# Altium PCB PCB.PcbDoc
Units mm, origin at the board's own origin, x right, y up, seen from the top; angles counter-clockwise.
Board outline 31.73 x 24.95 mm, 2 copper layers (Top Layer, Bottom Layer), stack 1.071 mm thick; 47 components, 28 nets, 156 pads, 5 vias.
Unrouted connection lines stored in the file: 86.
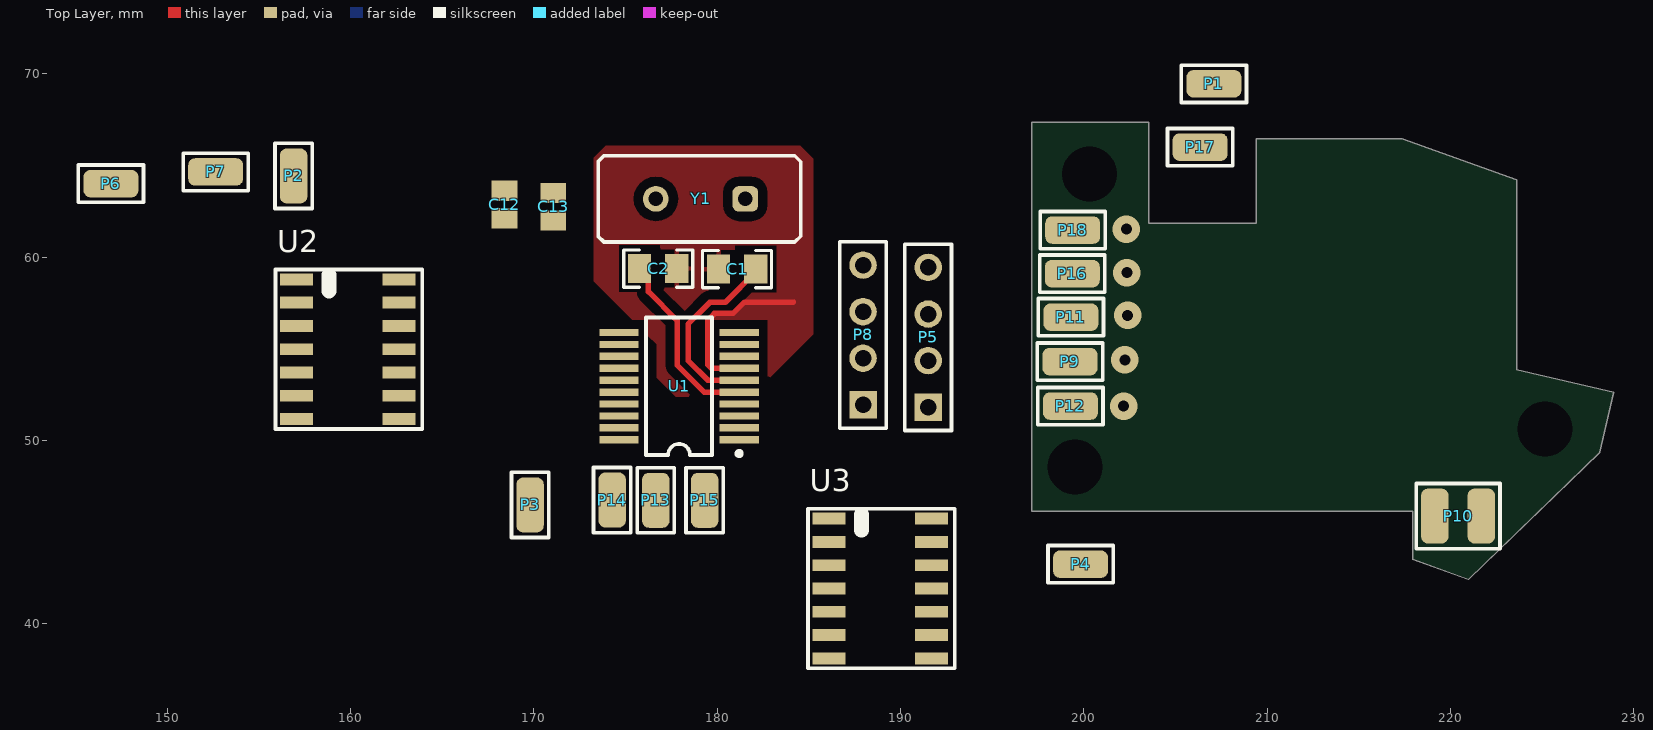
[diagram p0: Top Layer view]
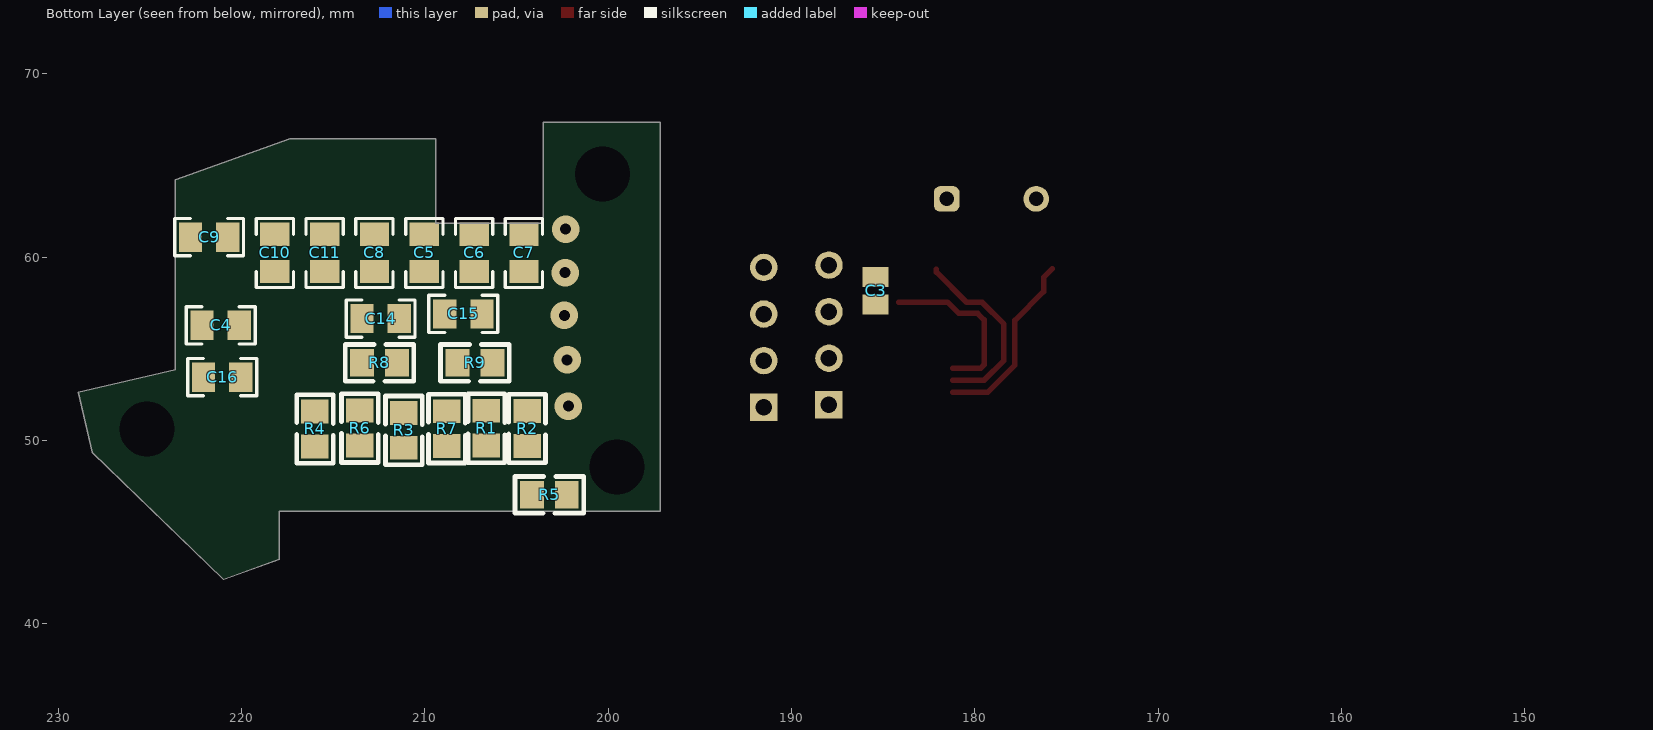
[diagram p1: Bottom Layer view, seen from below]

## Layer stack, top to bottom
Top Solder: solder mask 0.0102, Solder Resist, Dk 3.5
Top Layer: signal copper 0.0356
Dielectric 1: core 1, Core-043, Dk 4.3
Bottom Layer: signal copper 0.0356
Bottom Solder: solder mask 0.0102, Solder Resist, Dk 3.5

## Board outline
197.175,46.125 197.175,67.362 203.55,67.362 203.55,61.853 209.398,61.853 209.398,66.464 217.363,66.464 223.612,64.211 223.612,53.85 228.904,52.637 228.153,49.359 220.992,42.415 217.938,43.516 217.938,46.125

## Design rules (kind name [scope] priority, off if disabled: settings)
Clearance [All] p1: gap=0.3 ignorepadtopadclearanceinfootprint=FALSE except(0.5: Arc-Poly Track-Poly SMDPad-Poly THPad-Poly Via-Poly Fill-Poly Poly-Poly)
ComponentClearance [All] p1: gap=0.1 collisioncheckmode=3 verticalgap=0.1 showdistances=TRUE
PlaneClearance [All] p1: clearance=1
PlaneConnect [All] p1: planeconnectstyle=Relief reliefexpansion=0.5 reliefentries=4 reliefconductorwidth=0.3 reliefairgap=0.3
PolygonConnect [All] p1: connectstyle=Relief reliefconductorwidth=0.254 reliefentries=4 polygonreliefangle="90 Angle" airgapwidth=0.254
RoutingVias [All] p1: holewidth=0.6 width=1.5 viastyle="Through Hole" minholewidth=0.6 minwidth=1.2 maxholewidth=0.6 maxwidth=1.5
SolderMaskExpansion [All] p1: expansion=0.102 istentingtop=FALSE
Width [All] p1: maxlimit=2 minlimit=0.25 preferedwidth=0.3
27 further rules are at their usual default settings.

## Components (designator, comment, footprint, x,y, rotation, side; value= is the part's Value field where it differs from the comment)
C1 "Cap" C0805#1 182.107,59.35 r180 top value=*F
C2 "Cap" C0805#1 175.775,59.375 r0 top value=*F
C3 "Cap" C0805#2 185.42,58.166 r90 bottom value="470..3300 nF"
C4 "Cap" C0805#1 222.155,56.274 r180 bottom value=1u
C5 "Cap" C0805#1 210.034,61.24 r270 bottom value=1u
C6 "Cap" C0805#1 207.317,61.24 r270 bottom value=1u
C7 "Cap" C0805#1 204.599,59.209 r90 bottom value=1u
C8 "Cap" C0805#1 212.752,61.24 r270 bottom value=1u
C9 "Cap" C0805#1 222.785,61.088 r180 bottom value=1u
C10 "Cap" C0805#1 218.188,61.24 r270 bottom value=1u
C11 "Cap" C0805#1 215.47,61.24 r270 bottom value=1u
C12 "Cap" C0805#2 168.402,62.865 r90 top value=1uF
C13 "Cap" C0805#2 171.069,62.738 r90 top value=100nF
C14 "Cap" C0805#1 213.432,56.65 r180 bottom value=1u
C15 "Cap" C0805#1 208.923,56.899 r180 bottom value=1u
C16 "Cap" C0805#1 222.075,53.45 r180 bottom value=1u
P1 "BUT1" 1pin-smd 207.1,69.45 r270 top
P2 "BUT1" 1pin-smd 156.9,64.425 r0 top
P3 "BUT1" 1pin-smd 169.799,46.482 r180 top
P4 "BUT1" 1pin-smd 199.825,43.25 r270 top
P5 "UART Pads" HDR1X4 191.516,51.816 r90 top value=Connector
P6 "BUT1" 1pin-smd 146.939,64.008 r270 top
P7 "BUT1" 1pin-smd 152.654,64.643 r270 top
P8 "Programm Pads" HDR1X4 187.96,51.943 r90 top value=Connector
P9 "BUT1" 1pin-smd 199.25,54.3 r90 top
P10 "PWR Pads" 2pin-smd 221.69,45.875 r180 top
P11 "BUT1" 1pin-smd 199.3,56.725 r90 top
P12 "BUT1" 1pin-smd 199.275,51.875 r90 top
P13 "BUT1" 1pin-smd 176.657,46.736 r180 top
P14 "BUT1" 1pin-smd 174.275,46.75 r180 top
P15 "BUT1" 1pin-smd 179.324,46.736 r180 top
P16 "BUT1" 1pin-smd 199.375,59.1 r90 top
P17 "BUT1" 1pin-smd 206.35,66 r90 top
P18 "BUT1" 1pin-smd 199.4,61.475 r90 top
R1 "10k" RES-0805 206.647,50.666 r90 bottom
R2 "10k" RES-0805 204.425,50.65 r90 bottom
R3 "10k" RES-0805 211.15,50.55 r270 bottom
R4 "10k" RES-0805 216,50.625 r90 bottom
R5 "10k" RES-0805 203.21,47.029 r180 bottom
R6 "10k" RES-0805 213.55,50.675 r90 bottom
R7 "10k" RES-0805 208.809,50.641 r90 bottom
R8 "10k" RES-0805 212.479,54.232 r180 bottom
R9 "10k" RES-0805 207.272,54.232 r180 bottom
U1 "STM8S103F3P6" SSOP20 177.927,52.959 r90 top
U2 "MC74HC14A" SOIC-14_N 159.85,54.975 r0 top
U3 "MC74HC14A" SOIC-14_N 188.9,41.925 r0 top
Y1 "ECS-10-13-1" HC-49U 179.1,63.175 r180 top

## Footprints (in the part's own frame and the unit in brackets; to place one, negate y for a bottom-side part, rotate by r counter-clockwise, add the part's x,y. Pads: shape width x height; smd on the part's side, far side on the other; paste and mask are expansions set on the pad)
1pin-smd [mm]
  rrect50% 1.5x3 smd: 1(0,0)
  silkscreen extent -1.02,-1.78 1.02,1.78
2pin-smd [mm] "Connector; Header; 2 Position"
  rrect50% 1.5x3 smd: 1(0,0) 2(2.54,0)
  silkscreen extent -1.02,-1.78 3.56,1.78
C0805#1 [mil]
  rect 50x63 smd: 1(0,0) 2(80,0)
  silkscreen extent -34,-40 114,40, body extent 0,-25 78,26, height 51
C0805#2 [mil] "Chip Capacitor, Body 2.0x1.3mm, IPC High Density"
  rect 43.31x55.12 smd: 1(-29.53,0) 2(29.53,0)
  body extent -43,-29 43,29, height 55
HC-49U [mm] "Quartz Crystal, Thru-Hole; 2 Leads; Body 11.35 x 4.65 x 13.46 mm (LxWxH max)"
  rrect50% 1.4x1.4 hole 0.8: 1(-2.44,0)
  round 1.4 hole 0.8: 2(2.44,0)
  silkscreen extent -5.46,-2.35 5.59,2.35, body extent -5.48,-2.29 5.48,2.31, height 3.35
HDR1X4 [mm] "Connector; Header; 4 Position"
  rect 1.5x1.5 hole 0.9: 1(0,0)
  round 1.5 hole 0.9: 2(2.54,0) 3(5.08,0) 4(7.62,0)
  silkscreen extent -1.27,-1.27 8.89,1.27
RES-0805 [mm] "Chip Resistor; Body 2 x 1.3 mm (LxW typ)"
  rect 1.3x1.5 smd: 1(-0.95,0) 2(0.95,0)
  silkscreen extent -1.88,-1 1.88,1, body extent -1.24,-0.65 1.29,0.6, height 0.51
SOIC-14_N [mil] "SMD"
  rect 71x25.5 smd paste-787.4: 1(-110,150) 2(-110,100) 3(-110,50) 4(-110,0) 5(-110,-50) 6(-110,-100) 7(-110,-150) 8(110,-150) 9(110,-100) 10(110,-50) 11(110,0) 12(110,50) 13(110,100) 14(110,150)
  rrect50% 71x25.5 smd: 1(-110,150) 2(-110,100) 3(-110,50) 4(-110,0) 5(-110,-50) 6(-110,-100) 7(-110,-150) 8(110,-150) 9(110,-100) 10(110,-50) 11(110,0) 12(110,50) 13(110,100) 14(110,150)
  silkscreen extent -155,-171 160,171, body extent -138,-181 138,181, height 69
SSOP20 [mm] "SSOP, Plastic; 20 Leads; Body Width 5.3 mm; Pitch 0.65 mm"
  rect 0.4x2.15 smd: 1(-2.925,-3.275) 2(-2.275,-3.275) 3(-1.625,-3.275) 4(-0.975,-3.275) 5(-0.325,-3.275) 6(0.325,-3.275) 7(0.975,-3.275) 8(1.625,-3.275) 9(2.275,-3.275) 10(2.925,-3.275) 11(2.925,3.275) 12(2.275,3.275) 13(1.625,3.275) 14(0.975,3.275) 15(0.325,3.275) 16(-0.325,3.275) 17(-0.975,3.275) 18(-1.625,3.275) 19(-2.275,3.275) 20(-2.925,3.275)
  silkscreen extent -3.8,-3.4 3.75,1.8, body extent -3.25,-3.21 3.25,3.21, height 1.2

## Part data
C1 C2 C3 C4 C5 C6 C7 C8 C9 C10 C11 C12 C13 C14 C15 C16: "Capacitor ceramic SMD", Manufacturer=Murata, Part_Type=Capacitor
P1 P2 P3 P4 P6 P7 P9 P11 P12 P13 P14 P15 P16 P17 P18: library part "Header 1", Part_Type=Connector
P5 P8: library part "Header 4", "Header, 4-Pin", Manufacturer="Re-released for DXP Platform."
P10: library part "Header 2", "Header, 2-Pin", Part_Type=Connector
R1 R2 R3 R4 R5 R6 R7 R8 R9: library part Res, "Rectangular Thick Film Chip Resistor", Manufacturer="Altium Limited", Manufacturer_Part_Number=17-Dec-2003, ComponentLink1Description="Manufacturer Link", ComponentLink1URL=http://www.panasonic.com/industrial/components/resistive_products.htm, ComponentLink2Description=Datasheet, ComponentLink2URL=http://www.panasonic.com/industrial/components/pdf/AOA0000CE8.pdf, Note="If flow soldering, adjust pad width of PCB Footprint to 0.7 - 0.8 times the width of the resistor.", Part_Type=Resistor
U1: "No Description Available", Mfr_Name=STMicroelectronics, ComponentLink1Description=DataSheet, ComponentLink1URL=https://www.st.com/resource/en/datasheet/stm8s103f3.pdf, Copyright="Copyright (C) 2022 Ultra Librarian. All rights reserved.", Manufacturer_Part_Number=STM8S103F3P6, RefDes=RefDes, Type=DEV
U2 U3: "Hex Schmitt-Trigger / Inverter", Mfr_Name="ON Semiconductor", ComponentLink1Description=DataSheet, ComponentLink1URL=https://www.onsemi.com/pdf/datasheet/mc74hc14a-d.pdf, Copyright="Copyright (C) 2022 Ultra Librarian. All rights reserved.", Manufacturer_Part_Number=MC74HC14A, RefDes=RefDes, Type=DEV
Y1: "Crystal Oscillator", ComponentLink1Description="Manufacturer Link", ComponentLink1URL=http://www.ecsxtal.com/, ComponentLink2Description=Datasheet, ComponentLink2URL=http://www.ecsxtal.com/pdf2/HC49U.PDF, DatasheetDocument=18-Apr-2000, PackageReference=HC-49U, Published=17-Jul-2002, Publisher="Altium Limited"

## Free pads (board coordinates)
  round 0 hole 3 unplated mask+0.5: 6(199.525,48.55) 6(200.325,64.525) 6(225.15,50.625)

## Via types
v1: diameter 1.5, hole 0.6, Top Layer to Bottom Layer, 5 vias

## Nets (pads, with @x,y where several pads share a name; then routed paths per layer and width w, separated by ;. In a path a pad name is that pad's centre, name@x,y a point inside that pad or via, vN(x,y) a via of type N, cw(c..) or ccw(c..) an arc to the next point about the centre after c; other vN are vias at no path point)
+5: C4.2 C12.2 C13.2 C16.2 P8.1 P10.1 R1.2 R2.2 R3.2 R4.2 R5.2 R6.2 R7.2 R8.2 R9.2 U1.9 U2.14 U3.14
  other v1: 202.175,51.875
A_MINUS: C9.2 P3.1 R5.1 U2.5
A_PLUS: C10.2 P2.1 R6.1 U2.3
B_ANALOG: P13.1 U1.19
C_MINUS: C7.2 P6.1 R3.1 U2.11
C_PLUS: C8.2 P4.1 R4.1 U2.9
D_MINUS: C5.2 P9.1 R1.1 U3.1
D_PLUS: P7.1 U2.13
E_ANALOG: P14.1 U1.20
GND: C1.2 C2.2 C3.1 C4.1 C5.1 C6.1 C7.1 C8.1 C9.1 C10.1 C11.1 C12.1 C13.1 C14.1 C15.1 C16.1 P5.3 P5.4 P8.3 P10.2 P15.1 P16.1 P17.1 P18.1 U1.7 U2.7 U3.7 | length 9.3
  Top Layer w0.3: U1.7 179.691,53.934 179.498,54.127 179.498,56.573 179.849,56.924 180.874,56.924 181.5,57.55 184.15,57.55
JOYSTICK_BTN: C14.2 P12.1 R8.1 U1.1 U3.5
MODE_BTN: C11.2 P1.1 R7.1 U2.1
NetC1_1: C1.1 U1.6 Y1.1 | length 10.2
  Top Layer w0.3: U1.6 179.492,53.284 178.425,54.351 178.425,56.349 179.601,57.524 180.446,57.524 182.107,59.185 C1.1
NetC2_1: C2.1 U1.5 Y1.2 | length 10.1
  Top Layer w0.3: C2.1 176.26,58.89 176.26,58.115 177.825,56.55 177.825,54.103 179.294,52.634 U1.5
NetC3_2: C3.2 U1.8
NetC6_2: C6.2 R2.1
NetU1_10: U1.10 U2.2
NetU1_11: U1.11 U2.6
NetU1_12: U1.12 U2.4
NetU1_13: U1.13 U2.8
NetU1_14: U1.14 U2.10
NetU1_15: U1.15 U2.12
NetU1_16: U1.16 U3.2
NRST: P8.4 U1.4
SCND_BTN: C15.2 P11.1 R9.1 U3.3
SCND_BTN-1: U1.3 U1.17 U3.4
SWIM: P8.2 U1.18
UART-TX: P5.1 U1.2
pads on no net: P5.2 U3.6 U3.8 U3.9 U3.10 U3.11 U3.12 U3.13
copper on no net:
  other v1: 202.25,54.4 202.4,56.825 202.35,59.15 202.325,61.525

## Polygon pours and split planes (outlines as drawn)
GND on Top Layer "GND_L01_P000" (solid, pour order 0): 173.275,65.425 173.925,66.075 184.55,66.075 185.25,65.375 185.25,55.8 181.825,52.375 177.75,52.375 176.7,53.425 176.7,55.25 173.275,58.675